# EAGLE board PCB_WiFiModule to Xbee rev0.2 (EAGLE 8.4.3)
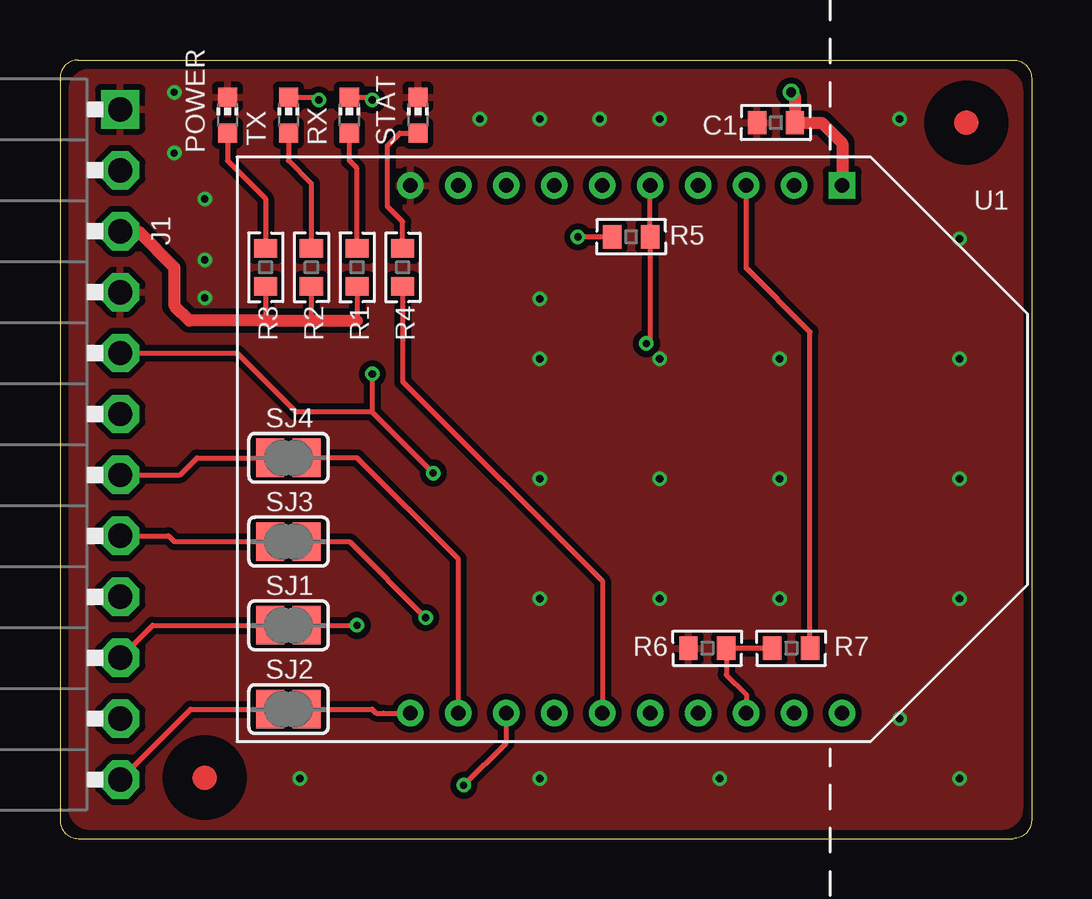
[diagram p0: board, top side]
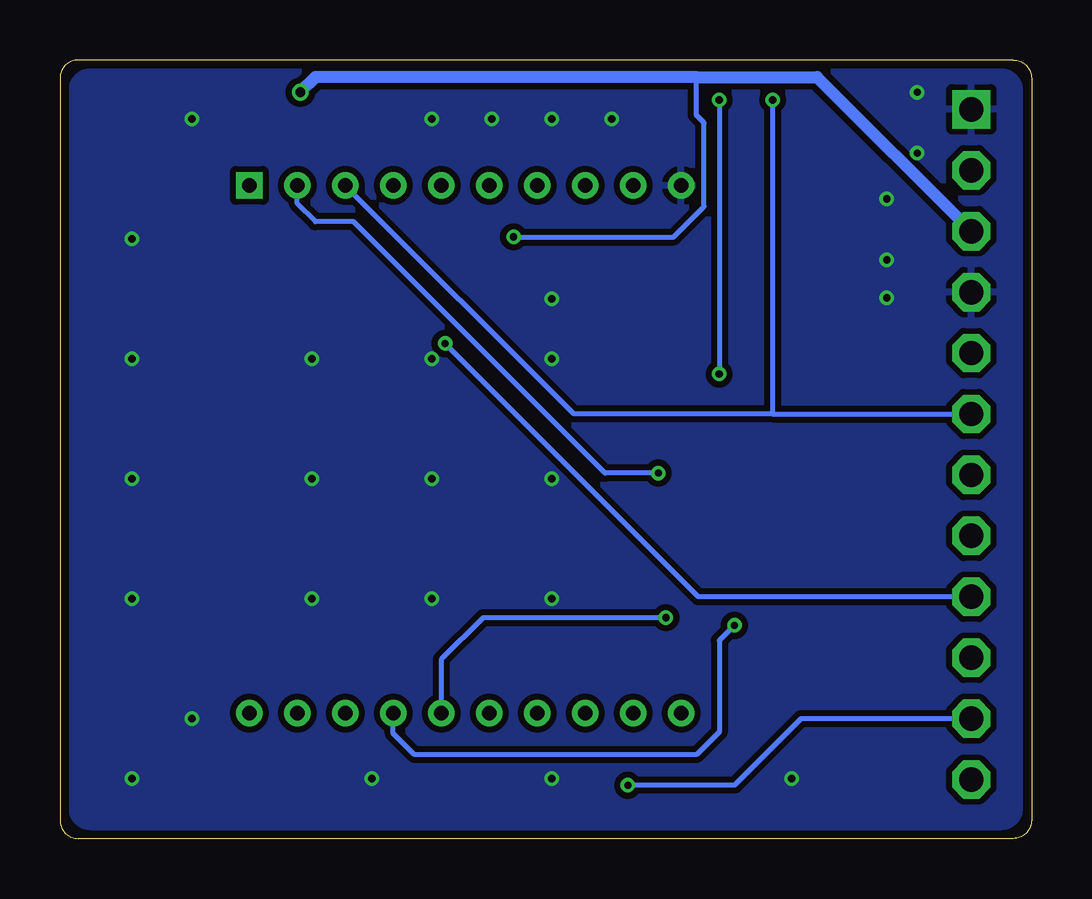
[diagram p1: board, bottom side, seen from below]

Size 40.5 x 32.46 mm. Coordinates in mm from the lower left corner, seen from the top.
Outline: 40.5,31.7 40.5,0.76 arc-90 39.74,0 0.76,0 arc-90 0,0.76 0,31.7 arc-90 0.76,32.46 39.74,32.46 arc-90 40.5,31.7
Copper layers (1+16): Top 0.035mm / dielectric 1.5mm / Bottom 0.035mm
Design rules "default *": minimum track width 8mil, minimum drill 0.3mm, track to track 6mil, track to pad 6mil, pad to pad 6mil, via to via 6mil, smd to smd 3mil, copper to edge 5mil, drill to drill 8mil, minimum pad ring 10mil, minimum via ring 6mil, stop-mask expansion 4mil, vias tented up to drill 15mil, thermal gap 10mil

## Footprints (pad centres in the part's own frame; a part is rotated, then mirrored left to right if it is on the bottom)
0603 = smd 0.762 x 0.965: 1 -0.787,0; 2 0.787,0
FA12-1W = drill 1.016 pad 1.6 square: 1 -13.97,3.81 | drill 1.016 pad 1.6 octagon: 2 -11.43,3.81; 3 -8.89,3.81; 4 -6.35,3.81; 5 -3.81,3.81; 6 -1.27,3.81; 7 1.27,3.81; 8 3.81,3.81; 9 6.35,3.81; 10 8.89,3.81; 11 11.43,3.81; 12 13.97,3.81
CHIP-LED0603 = smd 0.8 x 0.8: A 0,-0.75; C 0,0.75
SJ = smd 1.168 x 1.6: 1 -0.762,0; 2 0.762,0
XBP9B-DMUT-002 = drill 0.6 square: 1 -11,18 | drill 0.6: 2 -11,16; 3 -11,14; 4 -11,12; 5 -11,10; 6 -11,8; 7 -11,6; 8 -11,4; 9 -11,2; 10 -11,0; 11 11,0; 12 11,2; 13 11,4; 14 11,6; 15 11,8; 16 11,10; 17 11,12; 18 11,14; 19 11,16; 20 11,18

## Placement (x,y rotation side)
C1  10u/4V  [0603]  29.84,29.84 180 top
F1  [REF]  6.03,2.54 0 top
F2  [REF]  37.78,29.84 0 top
J1  FA12-1W  [FA12-1W]  -1.3,16.43 270 top
POWER  [CHIP-LED0603]  6.99,30.16 0 top
R1  1K  [0603]  12.38,23.81 270 top
R2  1K  [0603]  10.48,23.81 270 top
R3  1K  [0603]  8.57,23.81 270 top
R4  1K  [0603]  14.29,23.81 270 top
R5  1M  [0603]  23.81,25.08 180 top
R6  100K  [0603]  26.99,7.94 0 top
R7  470K  [0603]  30.48,7.94 0 top
RX  [CHIP-LED0603]  12.06,30.16 0 top
SJ1  [SJ]  9.53,8.89 0 top
SJ2  [SJ]  9.53,5.4 0 top
SJ3  [SJ]  9.53,12.38 0 top
SJ4  [SJ]  9.53,15.88 0 top
STAT  [CHIP-LED0603]  14.92,30.16 0 top
TX  [CHIP-LED0603]  9.53,30.16 0 top
U1  XBP9B-DMUT-002  [XBP9B-DMUT-002]  14.61,16.23 270 top

## Library data of the parts
C1 R1-R7 = discrete
F1 F2 = technol
J1 = CON-pinHeader-AON
POWER RX STAT TX = adafruit
SJ1-SJ4 = jumper
U1 = clackboard_lib

## Nets
+3.3V: C1.1 J1.3 R1.2 R2.2 R3.2 R5.2 U1.1
/WF_RST: J1.9 R5.1 U1.5
DGND: C1.2 J1.1 J1.4 POWER.C R6.1 STAT.C U1.10
DIO5: R4.2 U1.15
N$1: R4.1 STAT.A
N$2: R1.1 RX.A
N$3: R2.1 TX.A
N$4: R6.2 R7.1 U1.18
N$8: POWER.A R3.1
N$9: SJ4.2 U1.12
N$10: SJ2.2 U1.11
N$11: SJ3.2 U1.16
N$12: SJ1.2 U1.17
RE0: J1.11 U1.13
RF1: J1.12 SJ2.1
U6RX: J1.5 RX.C U1.2
U6TX: J1.6 R7.2 TX.C U1.3
VBAT: J1.2
WF_CTS: J1.8 SJ3.1
WF_GP8: J1.10 SJ1.1
WF_RTS: J1.7 SJ4.1

## Tracks (layer width: path | path; a pad name or v marks a point on that pad's centre or on a via)
+3.3V  (via drill 0.3, 0.4)
  Top 0.203: R1.2 12.38,21.59 | R2.2 10.48,21.59 | R3.2 8.57,21.59 | R5.2 v21.59,25.08
  Top 0.508: U1.1 32.6,28.99 31.75,29.84 C1.1 30.63,30.96 v30.48,31.11 | J1.3 3.25,25.32 4.76,23.81 4.76,22.23 5.4,21.59 8.57,21.59 10.48,21.59 12.38,21.59
  Bottom 0.203: v21.59,25.08 14.92,25.08 13.65,26.35 13.65,29.84 13.97,30.16 13.97,31.75
  Bottom 0.508: J1.3 8.94,31.75 13.97,31.75 29.84,31.75 v30.48,31.11
/WF_RST  (via drill 0.3)
  Top 0.203: U1.5 24.6,27.21 R5.1 24.61,25.07 24.61,20.8 v24.45,20.64
  Bottom 0.203: J1.9 13.89,10.08 v24.45,20.64
DGND  (via drill 0.3)
  other vias: 37.5,25 20,15 25,30 35,30 20,30 6.03,24.13 6.03,22.54 10,2.5 4.76,28.57 4.76,31.11 20,2.5 6.03,26.67 30,20 35,5 37.5,2.5 27.5,2.5 25,10 30,10 20,10 37.5,10 37.5,20 37.5,15 25,15 25,20 30,15 20,20 20,22.5 22.5,30 17.5,30
  pour Bottom (isolate 0.254): 1.26,31.96 39.24,31.96 arc-90 40,31.2 40,1.26 arc-90 39.24,0.5 1.26,0.5 arc-90 0.5,1.26 0.5,31.2 arc-90
  pour Top (isolate 0.254): 1.26,31.96 39.24,31.96 arc-90 40,31.2 40,1.26 arc-90 39.24,0.5 1.26,0.5 arc-90 0.5,1.26 0.5,31.2 arc-90
DIO5
  Top 0.203: R4.2 14.29,19.05 22.61,10.73 U1.15
N$1
  Top 0.203: R4.1 14.29,25.72 13.65,26.35 13.65,28.89 14.17,29.41 STAT.A
N$2
  Top 0.203: R1.1 12.38,27.94 12.06,28.26 RX.A
N$3
  Top 0.203: TX.A 9.53,28.26 10.48,27.3 R2.1
N$4
  Top 0.203: R7.1 R6.2 27.77,6.83 28.61,6 U1.18
N$8
  Top 0.203: POWER.A 6.99,28.26 8.57,26.67 R3.1
N$9
  Top 0.203: U1.12 16.61,11.65 12.38,15.88 SJ4.2
N$10
  Top 0.203: SJ2.2 13.02,5.4 13.19,5.23 13.48,5.23 U1.11
N$11  (via drill 0.3)
  Top 0.203: SJ3.2 12.06,12.38 v15.24,9.21
  Bottom 0.203: v15.24,9.21 22.86,9.21 24.61,7.46 U1.16
N$12  (via drill 0.3)
  Top 0.203: SJ1.2 v12.38,8.89
  Bottom 0.203: v12.38,8.89 13.02,8.26 13.02,4.45 13.97,3.49 25.72,3.49 26.61,4.38 U1.17
RE0  (via drill 0.3)
  Top 0.203: v16.83,2.22 18.61,4 U1.13
  Bottom 0.203: J1.11 9.61,5 12.38,2.22 v16.83,2.22
RF1
  Top 0.203: J1.12 5.45,5.4 SJ2.1
U6RX  (via drill 0.3)
  Top 0.203: J1.5 7.38,20.24 9.84,17.78 13.02,17.78 | 13.02,17.78 v15.56,15.24 | RX.C 12.9,30.91 v13.02,30.8 | v13.02,19.37 13.02,17.78
  Bottom 0.203: v15.56,15.24 17.78,15.24 28.26,25.72 29.84,25.72 30.61,26.48 U1.2 | v13.02,30.8 v13.02,19.37
U6TX  (via drill 0.3)
  Top 0.203: R7.2 31.27,21.12 28.61,23.78 U1.3 | TX.C 10.68,30.91 v10.79,30.8
  Bottom 0.203: 10.79,17.7 19.07,17.7 U1.3 | 10.79,17.7 J1.6 | v10.79,30.8 10.79,17.7
WF_CTS
  Top 0.203: J1.8 4.53,12.62 4.76,12.38 SJ3.1
WF_GP8
  Top 0.203: J1.10 3.86,8.89 SJ1.1
WF_RTS
  Top 0.203: J1.7 5,15.16 5.71,15.88 SJ4.1

## Text on the board
_tNames: (C) 2014 eLock Technologies LLC | R20 | R21 | M1 | WiFi module | R1.0